# Allegro board PT8618_2.brd
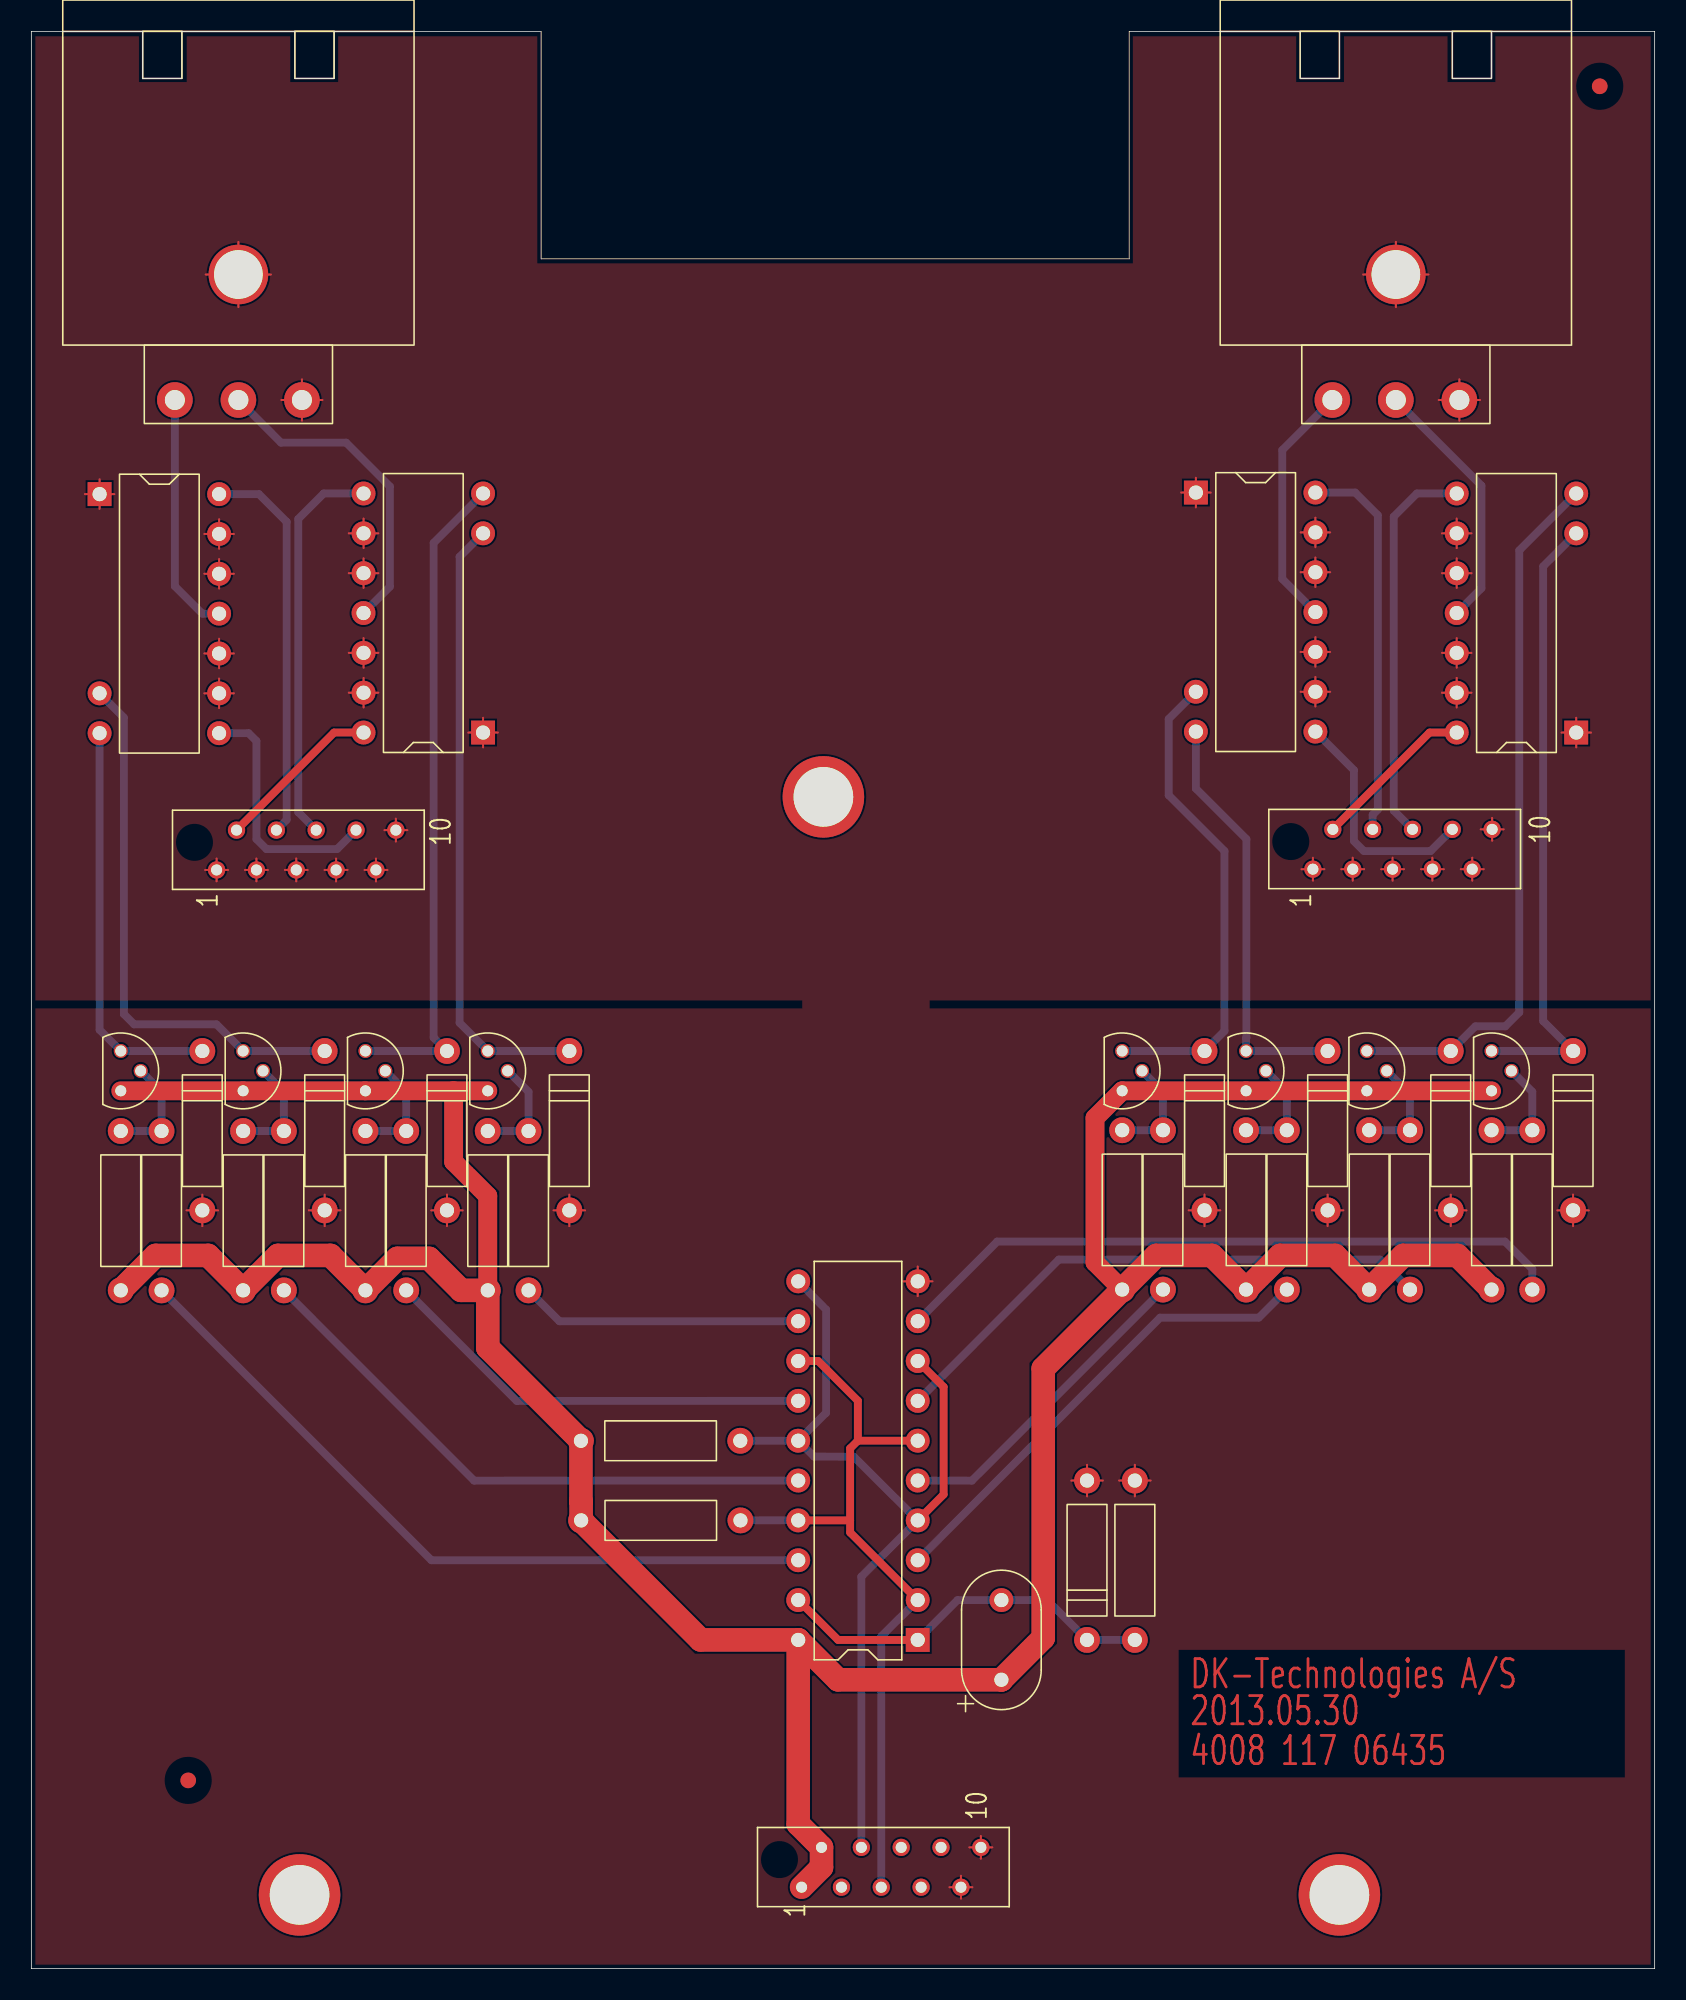
[diagram p0: board, top side]
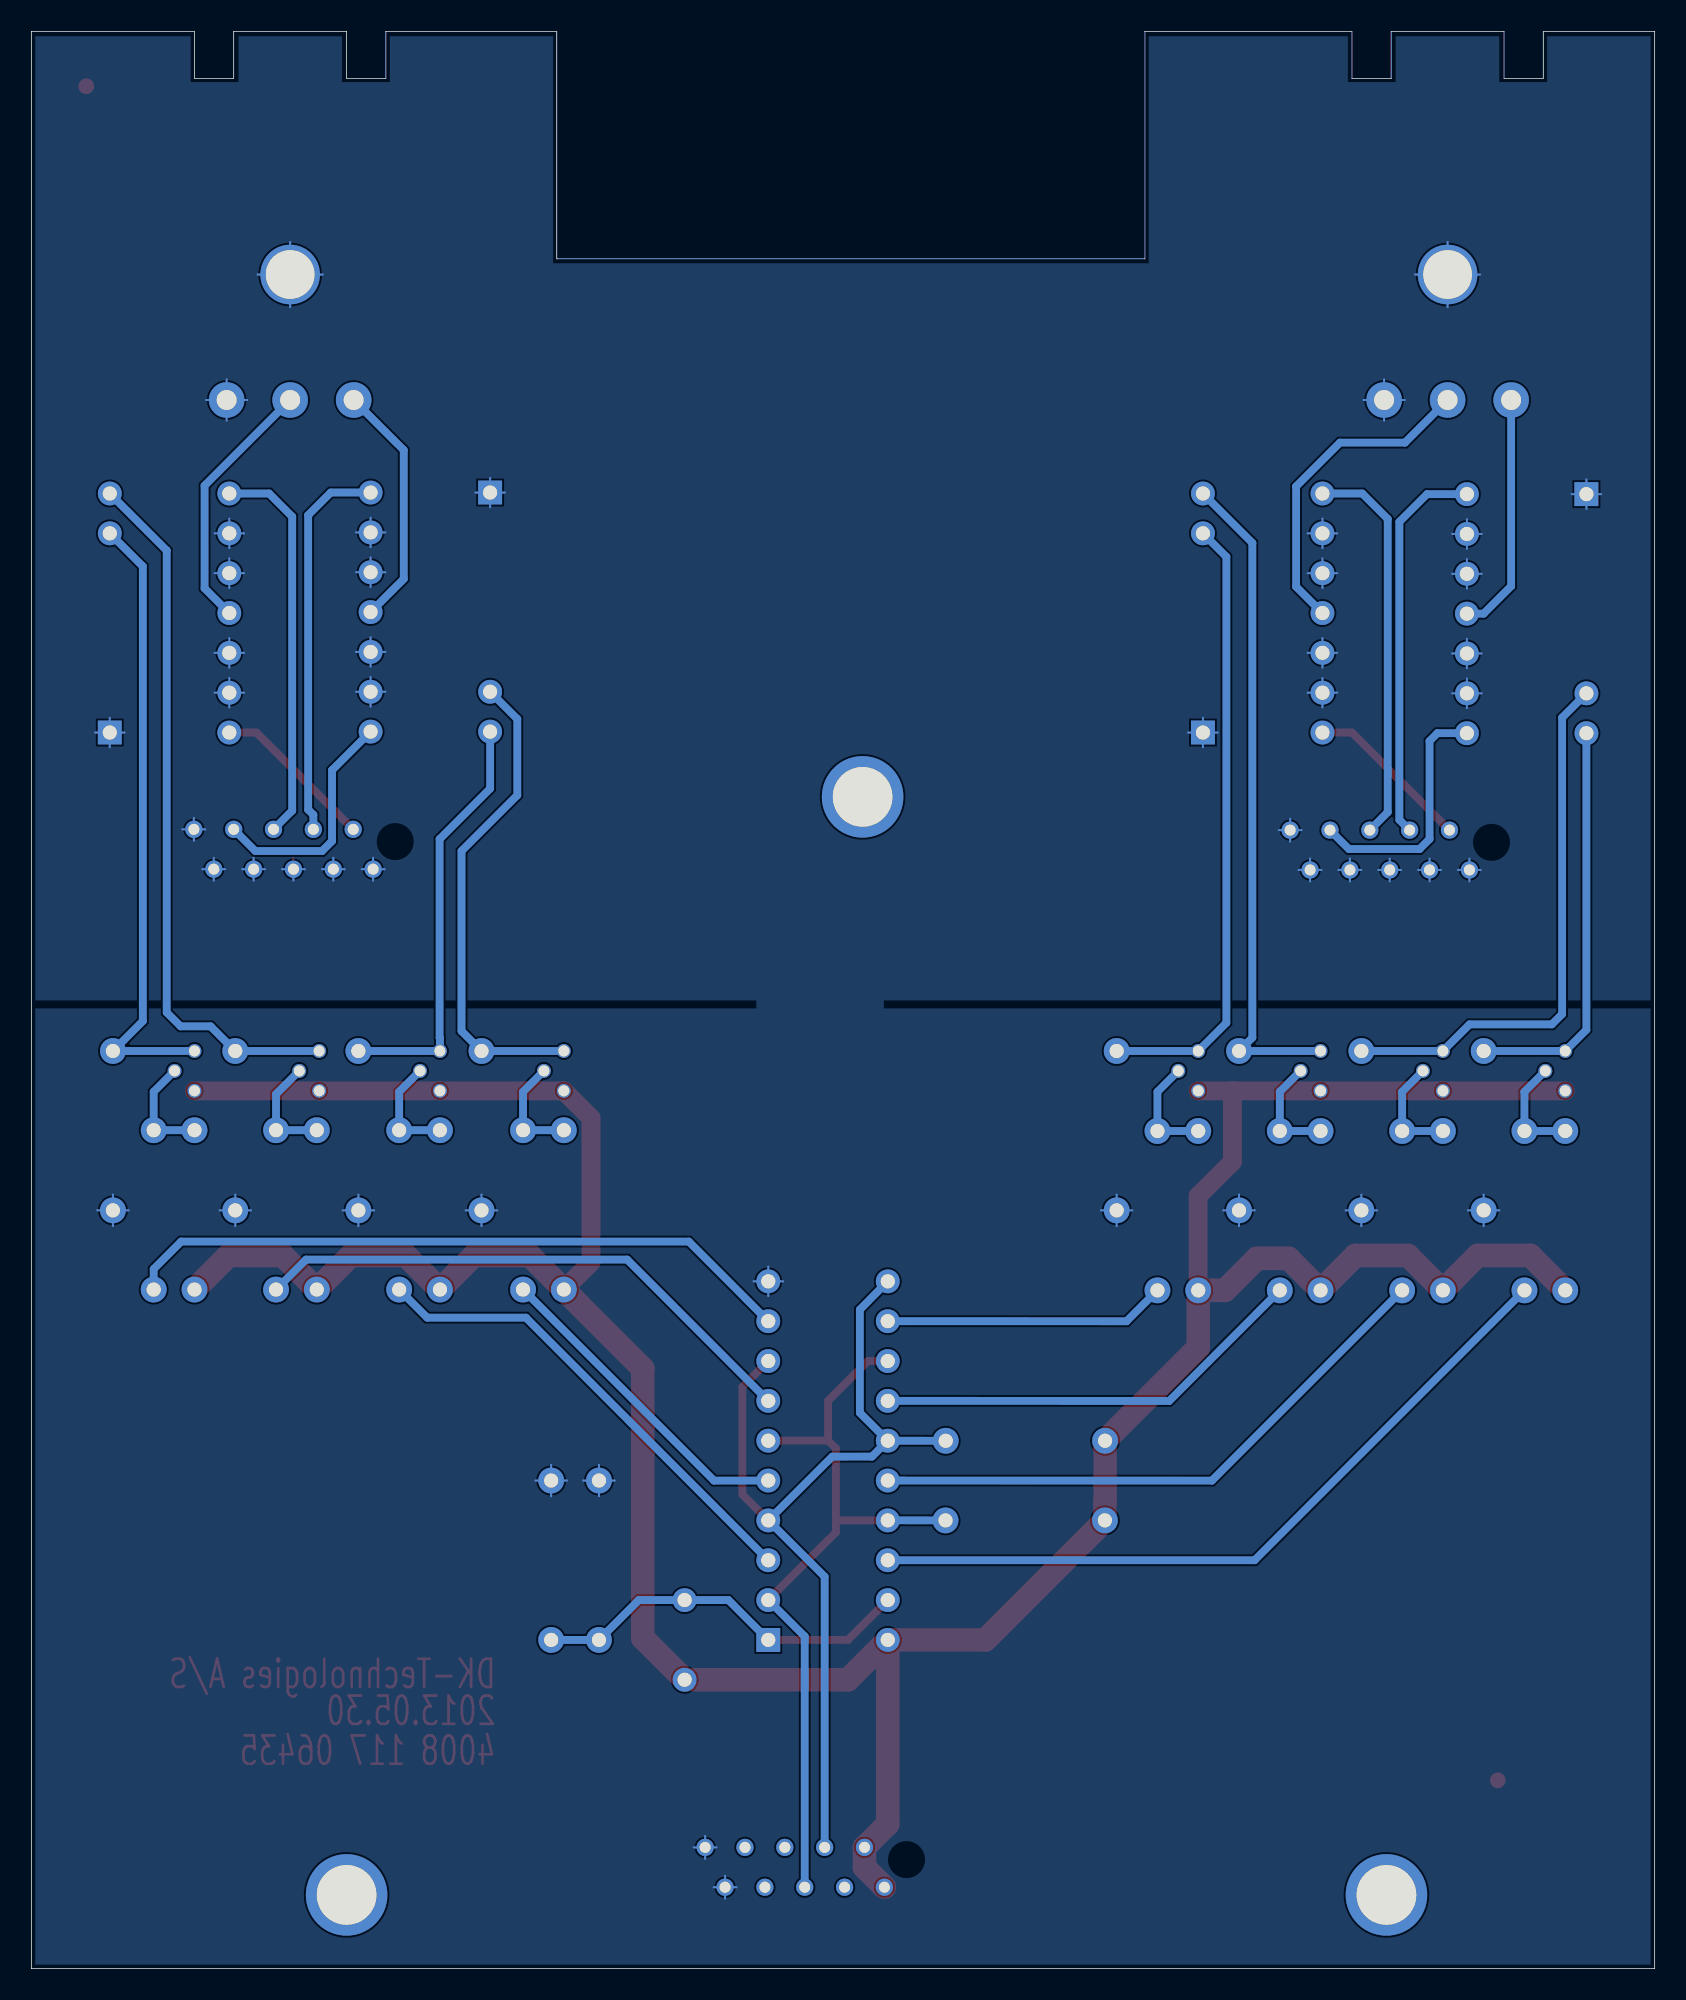
[diagram p1: board, bottom side, seen from below]

Outline 103.5 x 123.5 mm; copper layers: TOP, BOTTOM. Coordinates in mm from the lower left corner of the outline.
Outline path: 0,123.5 7.1,123.5 7.1,120.5 9.6,120.5 9.6,123.5 16.8,123.5 16.8,120.5 19.3,120.5 19.3,123.5 32.5,123.5 32.5,109 70,109 70,123.5 80.9,123.5 80.9,120.5 83.4,120.5 83.4,123.5 90.6,123.5 90.6,120.5 93.1,120.5 93.1,123.5 103.5,123.5 103.5,0 0,0 0,123.5

## Placement (name value [footprint] x y rotation side)
C401  10u/16V  [CAP200MIL_POL]  61.85 18.41 0 top
D401  BAW62  [DIODE400]  10.9 58.5 180 top
D402  BAW62  [DIODE400]  18.7 58.5 180 top
D403  BAW62  [DIODE400]  26.5 58.5 180 top
D404  BAW62  [DIODE400]  34.3 58.5 180 top
D405  BAW62  [DIODE400]  90.5 58.5 180 top
D406  BAW62  [DIODE400]  98.3 58.5 180 top
D407  BAW62  [DIODE400]  82.65 58.5 180 top
D408  BAW62  [DIODE400]  74.8 58.5 180 top
D409  BAT81  [DIODE400]  67.31 20.95 0 top
NOREF  -  [unnamed]  17.1 4.7 0 top
NOREF#2  -  [unnamed#2]  100 120 0 top
NOREF#3  -  [unnamed]  50.5 74.7 0 top
NOREF#4  -  [unnamed#2]  10 12 0 top
NOREF#5  -  [unnamed]  83.4 4.7 0 top
Q401  BC327  [TO92_OFF]  5.7 58.5 0 top
Q402  BC327  [TO92_OFF]  13.5 58.5 0 top
Q403  BC327  [TO92_OFF]  21.3 58.5 0 top
Q404  BC327  [TO92_OFF]  29.1 58.5 0 top
Q405  BC327  [TO92_OFF]  85.15 58.5 0 top
Q406  BC327  [TO92_OFF]  93.1 58.5 0 top
Q407  BC327  [TO92_OFF]  77.45 58.5 0 top
Q408  BC327  [TO92_OFF]  69.55 58.5 0 top
R401  2K67  [RES400]  8.3 53.4 180 top
R402  1K0  [RES400]  5.7 53.4 180 top
R403  2K67  [RES400]  16.1 53.4 180 top
R404  1K0  [RES400]  13.5 53.4 180 top
R405  2K67  [RES400]  23.9 53.4 180 top
R406  1K0  [RES400]  21.3 53.4 180 top
R407  2K67  [RES400]  31.7 53.4 180 top
R408  1K0  [RES400]  29.1 53.4 180 top
R409  2K67  [RES400]  87.9 53.45 180 top
R410  1K0  [RES400]  85.3 53.45 180 top
R411  2K67  [RES400]  95.7 53.45 180 top
R412  1K0  [RES400]  93.1 53.45 180 top
R413  2K67  [RES400]  80.05 53.45 180 top
R414  1K0  [RES400]  77.45 53.45 180 top
R415  2K67  [RES400]  72.15 53.45 180 top
R416  1K0  [RES400]  69.55 53.45 180 top
R417  10K0  [RES400]  70.36 31.11 180 top
R418  10K0  [RES400]  45.2 33.65 90 top
R419  10K0  [RES400]  45.21 28.57 90 top
RE401  RK1-L2-SV  [DIP14_3-RELAY]  4.35 94 0 top
RE402  RK1-L2-SV  [DIP14_3-RELAY]  28.8 78.8 180 top
RE403  RK1-L2-SV  [DIP14_3-RELAY]  74.25 94.1 0 top
RE404  RK1-L2-SV  [DIP14_3-RELAY]  98.5 78.8 180 top
U401  SN74HC244N  [DIP20_3]  56.52 20.95 180 top
XA4  CON10  [CONN_MICROMATCH_10]  33.4 67.5 90 top
XB4  CON4  [CONN_XLM-3-32PCV]  13.2 100 270 top
XC4  CON10  [CONN_MICROMATCH_10]  103.3 67.55 90 top
XD4  CON4  [CONN_XLM-3-32PCV]  87 100 270 top
XE4  CON10  [CONN_MICROMATCH_10]  70.7 2.65 90 top

## Library data of the parts
C401 = CAPACITOR POL_0: User Part Number: ***; Tolerance: ***
D401-D409 = DIODE_0: User Part Number: ***; Tolerance: ***
Q401-Q408 = PNP_0
R401-R419 = R_0: Tolerance: ***; User Part Number: ***
RE401-RE404 = RELAY SPDT_5: User Part Number: ***; Tolerance: ***
U401 = 74LVT244: Tolerance: ***; User Part Number: ***
XA4 XC4 XE4 = CON10
XB4 XD4 = CON4

## Footprints (pads in the part's own frame, mm; a bottom-side part is the same pattern mirrored in y, then rotated)
CAP200MIL_POL
  round 1.524 hole 0.9: 1(0,0) 2(0,5.08)
CONN_MICROMATCH_10
  round 0 hole 1.95 unplated: (4.3,23)
  round 1.1 hole 0.7: 1(2.54,21.59) 2(5.08,20.32) 3(2.54,19.05) 4(5.08,17.78) 5(2.54,16.51) 6(5.08,15.24) 7(2.54,13.97) 8(5.08,12.7) 9(2.54,11.43) 10(5.08,10.16)
CONN_XLM-3-32PCV
  round 2.27 hole 1.27: 1(0,4.05) 2(0,-4.05) 3(0,0)
  round 3.8 hole 3.1: 4(-8,0)
DIODE400
  round 1.651 hole 0.9: 1(0,0) 2(0,10.16)
DIP14_3-RELAY
  rect 1.524x1.524 hole 0.9: 1(0,0)
  round 1.524 hole 0.9: 6(0,-12.7) 7(0,-15.24) 8(7.62,-15.24) 9(7.62,-12.7) 10(7.62,-10.16) 11(7.62,-7.62) 12(7.62,-5.08) 13(7.62,-2.54) 14(7.62,0)
DIP20_3
  rect 1.524x1.524 hole 0.9: 1(0,0)
  round 1.524 hole 0.9: 2(0,-2.54) 3(0,-5.08) 4(0,-7.62) 5(0,-10.16) 6(0,-12.7) 7(0,-15.24) 8(0,-17.78) 9(0,-20.32) 10(0,-22.86) 11(7.62,-22.86) 12(7.62,-20.32) 13(7.62,-17.78) 14(7.62,-15.24) 15(7.62,-12.7) 16(7.62,-10.16) 17(7.62,-7.62) 18(7.62,-5.08) 19(7.62,-2.54) 20(7.62,0)
RES400
  round 1.651 hole 0.9: 1(0,0) 2(0,10.16)
TO92_OFF
  round 0.889 hole 0.7: 1(0,0) 2(1.27,-1.27) 3(0,-2.54)
unnamed
  round 5.2 hole 3.8: (0,0)
unnamed#2
  round 1 smd: (0,0)

## Nets
+5V: C401.1 Q401.3(EMITTER) Q402.3(EMITTER) Q403.3(EMITTER) Q404.3(EMITTER) Q405.3(EMITTER) Q406.3(EMITTER) Q407.3(EMITTER) Q408.3(EMITTER) R402.2 R404.2 R406.2 R408.2 R410.2 R412.2 R414.2 R416.2 R418.2 R419.2 U401.20(VCC) XE4.1 XE4.2
GND_SIGNAL: D401.2 D402.2 D403.2 D404.2 D405.2 D406.2 D407.2 D408.2 D409.2 R417.1 RE401.1(C) RE401.9(C9) RE401.10(C10) RE401.12(C12) RE401.13(C13) RE402.1(C) RE402.9(C9) RE402.10(C10) RE402.12(C12) RE402.13(C13) RE403.1(C) RE403.9(C9) RE403.10(C10) RE403.12(C12) RE403.13(C13) RE404.1(C) RE404.9(C9) RE404.10(C10) RE404.12(C12) RE404.13(C13) U401.10(GND) XA4.1 XA4.3 XA4.5 XA4.7 XA4.9 XA4.10 XB4.1 XB4.4 XC4.1 XC4.3 XC4.5 XC4.7 XC4.9 XC4.10 XD4.1 XD4.4 XE4.9 XE4.10
RESET_REL: R419.1 U401.2(I0) U401.6(I2) U401.13(I6) U401.17(I4) XE4.5
SET_REL: R418.1 U401.4(I1) U401.8(I3) U401.11(I7) U401.15(I5) XE4.4
N01245: C401.2 D409.1 R417.2 U401.1(O\E\1\) U401.19(O\E\2\)
N02897: Q401.2(BASE) R401.1 R402.1
N03054: D401.1 Q401.1(COLLECTOR) RE401.7(SET)
N03551: Q402.2(BASE) R403.1 R404.1
N03575: D402.1 Q402.1(COLLECTOR) RE401.6(RESET)
N04126: Q403.2(BASE) R405.1 R406.1
N04150: D403.1 Q403.1(COLLECTOR) RE402.7(SET)
N04216: Q404.2(BASE) R407.1 R408.1
N04256: D404.1 Q404.1(COLLECTOR) RE402.6(RESET)
N04568: Q405.2(BASE) R409.1 R410.1
N04592: D405.1 Q405.1(COLLECTOR) RE404.7(SET)
N04658: Q406.2(BASE) R411.1 R412.1
N04698: D406.1 Q406.1(COLLECTOR) RE404.6(RESET)
N05603: Q407.2(BASE) R413.1 R414.1
N05627: D407.1 Q407.1(COLLECTOR) RE403.7(SET)
N05693: Q408.2(BASE) R415.1 R416.1
N05733: D408.1 Q408.1(COLLECTOR) RE403.6(RESET)
N06021: R401.2 U401.18(O0)
N06033: R403.2 U401.16(O1)
N06051: R405.2 U401.14(O2)
N06063: R407.2 U401.12(O3)
N06202: R413.2 U401.3(O4)
N06214: R415.2 U401.5(O5)
N06252: R409.2 U401.7(O6)
N06264: R411.2 U401.9(O7)
N07388: RE401.11(COMMON) XB4.2
N08121: RE402.11(COMMON) XB4.3
N13215: RE402.14(NC) XA4.2
N13219: RE402.8(NO) XA4.6
N13231: RE401.14(NC) XA4.4
N13243: RE401.8(NO) XA4.8
N13688: RE404.8(NO) XC4.6
N14649: RE404.14(NC) XC4.2
N14657: RE403.14(NC) XC4.4
N14661: RE403.8(NO) XC4.8
N15236: RE403.11(COMMON) XD4.2
N15633: RE404.11(COMMON) XD4.3

Pads without a net: XE4 3 6 7 8

## Routing (per net, layer and track width the routed paths; a pad name or vN(x,y) marks a point on that pad's centre or on a via; arc(x,y) is an arc through that point)
+5V: length 225.5
  TOP w1.2: 26.92,55.96 Q404.3 ; 26.92,55.96 26.92,51.44 29.1,49.26 R408.2 ; 26.92,55.96 Q403.3 Q402.3 Q401.3 ; Q406.3 Q405.3 Q407.3 Q408.3 67.82,54.23 67.82,45.02 R416.2
  TOP w1.5: U401.20 48.9,9.21 XE4.2 50.38,6.46 XE4.1 ; U401.20 51.44,18.41 C401.1 64.52,21.08 64.52,38.26 R416.2 71.73,45.47 75.27,45.47 R414.2 79.63,45.47 83.12,45.47 R410.2 87.48,45.47 90.92,45.47 R412.2 ; U401.20 42.67,20.95 R419.2 35.05,29.78 35.04,29.79 R418.2 29.1,39.59 R408.2 27.4,43.24 25.36,45.28 23.34,45.28 R406.2 19.07,45.47 15.73,45.47 R404.2 11.27,45.47 7.93,45.47 R402.2
GND_SIGNAL: length 373.3
  TOP w0.127: D408.2 74.8,49.34 ; D408.2 74.8,47.34 ; D408.2 75.8,48.34 ; D408.2 73.8,48.34 ; 81.87,83 RE403.10 ; RE403.10 80.93,83.94 ; RE403.10 81.87,84.88 ; RE403.10 82.81,83.94 ; 87,105.92 XD4.4 ; XD4.4 89.08,108 ; XD4.4 84.92,108 ; XD4.4 87,110.08 ; 89.74,100 XD4.1 ; XD4.1 92.36,100 ; XD4.1 91.05,101.31 ; XD4.1 91.05,98.69 ; RE401.1 4.35,94.94 ; RE401.1 5.29,94 ; RE401.1 3.41,94 ; RE401.1 4.35,93.06 ; 21.24,70.04 XA4.9 ; XA4.9 22.7,70.04 ; XA4.9 21.97,70.77 ; XA4.9 21.97,69.31 ; RE402.12 21.18,84.82 ; RE402.12 22.12,83.88 ; RE402.12 21.18,82.94 ; RE402.12 20.24,83.88 ; XA4.10 23.24,73.31 ; XA4.10 22.51,72.58 ; XA4.10 23.24,71.85 ; XA4.10 23.97,72.58 ; RE401.9 11.97,82.24 ; RE401.9 11.97,80.36 ; RE401.9 12.91,81.3 ; RE401.9 11.03,81.3 ; D402.2 18.7,49.34 ; D402.2 18.7,47.34 ; D402.2 17.7,48.34 ; D402.2 19.7,48.34 ; 11.03,91.46 RE401.13 ; RE401.13 11.97,92.4 ; RE401.13 11.97,90.52 ; RE401.13 12.91,91.46 ; D401.2 10.9,49.34 ; D401.2 9.9,48.34 ; D401.2 10.9,47.34 ; D401.2 11.9,48.34 ; 11.03,83.84 RE401.10 ; RE401.10 11.97,84.78 ; RE401.10 11.97,82.9 ; RE401.10 12.91,83.84 ; 81.87,90.62 RE403.13 ; RE403.13 81.87,92.5 ; RE403.13 80.93,91.56 ; RE403.13 82.81,91.56 ; 25.5,48.34 D403.2 ; D403.2 26.5,49.34 ; D403.2 26.5,47.34 ; D403.2 27.5,48.34 ; D404.2 35.3,48.34 ; D404.2 34.3,47.34 ; D404.2 34.3,49.34 ; D404.2 33.3,48.34 ; U401.10 56.52,44.76 ; U401.10 55.58,43.81 ; U401.10 56.52,42.88 ; U401.10 57.45,43.81 ; 11.81,69.31 XA4.1 ; XA4.1 11.08,70.04 ; XA4.1 12.54,70.04 ; XA4.1 11.81,70.77 ; XC4.3 84.25,70.82 ; XC4.3 83.52,70.09 ; XC4.3 84.98,70.09 ; XC4.3 84.25,69.36 ; 59.81,7.73 XE4.10 ; XE4.10 60.54,8.46 ; XE4.10 61.27,7.73 ; XE4.10 60.54,7 ; RE403.12 81.87,89.96 ; RE403.12 80.93,89.02 ; RE403.12 81.87,88.08 ; RE403.12 82.81,89.02 ; RE402.13 22.12,81.34 ; RE402.13 20.24,81.34 ; RE402.13 21.18,82.28 ; RE402.13 21.18,80.4 ; RE404.13 91.82,81.34 ; RE404.13 89.94,81.34 ; RE404.13 90.88,80.4 ; RE404.13 90.88,82.28 ; R417.1 70.36,32.12 ; R417.1 70.36,30.11 ; R417.1 69.35,31.11 ; R417.1 71.36,31.11 ; XC4.5 86.79,70.82 ; XC4.5 87.52,70.09 ; XC4.5 86.06,70.09 ; XC4.5 86.79,69.36 ; 27.86,78.8 RE402.1 ; RE402.1 29.74,78.8 ; RE402.1 28.8,79.74 ; RE402.1 28.8,77.86 ; 67.31,30.11 D409.2 ; D409.2 68.31,31.11 ; D409.2 67.31,32.12 ; D409.2 66.31,31.11 ; 81.71,69.36 XC4.1 ; XC4.1 80.98,70.09 ; XC4.1 81.71,70.82 ; XC4.1 82.44,70.09 ; 13.2,105.92 XB4.4 ; XB4.4 11.12,108 ; XB4.4 15.28,108 ; XB4.4 13.2,110.08 ; XB4.1 17.25,101.31 ; XB4.1 15.94,100 ; XB4.1 17.25,98.69 ; XB4.1 18.56,100 ; 92.41,72.63 XC4.10 ; XC4.10 93.14,71.9 ; XC4.10 93.14,73.36 ; XC4.10 93.87,72.63 ; RE404.9 90.88,92.44 ; RE404.9 89.94,91.5 ; RE404.9 90.88,90.56 ; RE404.9 91.82,91.5 ; XC4.9 91.87,70.82 ; XC4.9 91.87,69.36 ; XC4.9 91.14,70.09 ; XC4.9 92.6,70.09 ; 89.94,83.88 RE404.12 ; RE404.12 90.88,84.82 ; RE404.12 91.82,83.88 ; RE404.12 90.88,82.94 ; 11.97,87.98 RE401.12 ; RE401.12 11.97,89.86 ; RE401.12 12.91,88.92 ; RE401.12 11.03,88.92 ; 20.24,88.96 RE402.10 ; RE402.10 21.18,89.9 ; RE402.10 22.12,88.96 ; RE402.10 21.18,88.02 ; 88.6,70.09 XC4.7 ; XC4.7 89.33,69.36 ; XC4.7 90.06,70.09 ; XC4.7 89.33,70.82 ; 90.5,47.34 D405.2 ; D405.2 90.5,49.34 ; D405.2 91.5,48.34 ; D405.2 89.5,48.34 ; 97.3,48.34 D406.2 ; D406.2 99.3,48.34 ; D406.2 98.3,49.34 ; D406.2 98.3,47.34 ; 81.65,48.34 D407.2 ; D407.2 82.65,47.34 ; D407.2 82.65,49.34 ; D407.2 83.65,48.34 ; RE404.1 98.5,79.74 ; RE404.1 98.5,77.86 ; RE404.1 97.56,78.8 ; RE404.1 99.44,78.8 ; 74.25,93.16 RE403.1 ; RE403.1 73.31,94.1 ; RE403.1 74.25,95.04 ; RE403.1 75.19,94.1 ; 89.94,88.96 RE404.10 ; RE404.10 90.88,89.9 ; RE404.10 90.88,88.02 ; RE404.10 91.82,88.96 ; XA4.3 14.35,70.77 ; XA4.3 14.35,69.31 ; XA4.3 15.08,70.04 ; XA4.3 13.62,70.04 ; 21.18,90.56 RE402.9 ; RE402.9 22.12,91.5 ; RE402.9 21.18,92.44 ; RE402.9 20.24,91.5 ; RE403.9 82.81,81.4 ; RE403.9 81.87,82.34 ; RE403.9 80.93,81.4 ; RE403.9 81.87,80.46 ; 58.54,5.19 XE4.9 ; XE4.9 59.27,5.92 ; XE4.9 60,5.19 ; XE4.9 59.27,4.46 ; XA4.7 20.16,70.04 ; XA4.7 19.43,69.31 ; XA4.7 18.7,70.04 ; XA4.7 19.43,70.77 ; XA4.5 17.62,70.04 ; XA4.5 16.89,70.77 ; XA4.5 16.16,70.04 ; XA4.5 16.89,69.31
  BOTTOM w0.127: 11.97,90.52 RE401.13 ; RE401.13 11.03,91.46 ; RE401.13 11.97,92.4 ; RE401.13 12.91,91.46 ; RE402.13 21.18,82.28 ; RE402.13 22.12,81.34 ; RE402.13 20.24,81.34 ; RE402.13 21.18,80.4 ; D401.2 11.9,48.34 ; D401.2 10.9,47.34 ; D401.2 10.9,49.34 ; D401.2 9.9,48.34 ; XC4.10 93.87,72.63 ; XC4.10 92.41,72.63 ; XC4.10 93.14,73.36 ; XC4.10 93.14,71.9 ; RE401.10 11.97,84.78 ; RE401.10 11.03,83.84 ; RE401.10 12.91,83.84 ; RE401.10 11.97,82.9 ; 11.81,69.31 XA4.1 ; XA4.1 11.08,70.04 ; XA4.1 12.54,70.04 ; XA4.1 11.81,70.77 ; 82.65,47.34 D407.2 ; D407.2 81.65,48.34 ; D407.2 83.65,48.34 ; D407.2 82.65,49.34 ; RE404.1 99.44,78.8 ; RE404.1 98.5,77.86 ; RE404.1 97.56,78.8 ; RE404.1 98.5,79.74 ; XE4.9 59.27,5.92 ; XE4.9 58.54,5.19 ; XE4.9 59.27,4.46 ; XE4.9 60,5.19 ; XD4.4 89.08,108 ; XD4.4 84.92,108 ; XD4.4 87,110.08 ; XD4.4 87,105.92 ; 98.3,47.34 D406.2 ; D406.2 97.3,48.34 ; D406.2 99.3,48.34 ; D406.2 98.3,49.34 ; XA4.9 22.7,70.04 ; XA4.9 21.97,69.31 ; XA4.9 21.97,70.77 ; XA4.9 21.24,70.04 ; RE402.10 21.18,89.9 ; RE402.10 21.18,88.02 ; RE402.10 20.24,88.96 ; RE402.10 22.12,88.96 ; XC4.9 91.87,70.82 ; XC4.9 91.87,69.36 ; XC4.9 92.6,70.09 ; XC4.9 91.14,70.09 ; 20.24,83.88 RE402.12 ; RE402.12 22.12,83.88 ; RE402.12 21.18,84.82 ; RE402.12 21.18,82.94 ; RE404.13 91.82,81.34 ; RE404.13 89.94,81.34 ; RE404.13 90.88,80.4 ; RE404.13 90.88,82.28 ; 13.62,70.04 XA4.3 ; XA4.3 14.35,69.31 ; XA4.3 14.35,70.77 ; XA4.3 15.08,70.04 ; D405.2 91.5,48.34 ; D405.2 90.5,47.34 ; D405.2 89.5,48.34 ; D405.2 90.5,49.34 ; XC4.5 87.52,70.09 ; XC4.5 86.06,70.09 ; XC4.5 86.79,69.36 ; 74.25,93.16 RE403.1 ; RE403.1 73.31,94.1 ; RE403.1 75.19,94.1 ; RE403.1 74.25,95.04 ; 81.71,69.36 XC4.1 ; XC4.1 81.71,70.82 ; XC4.1 82.44,70.09 ; XC4.1 80.98,70.09 ; 27.86,78.8 RE402.1 ; RE402.1 28.8,77.86 ; RE402.1 28.8,79.74 ; RE402.1 29.74,78.8 ; D404.2 35.3,48.34 ; D404.2 34.3,49.34 ; D404.2 33.3,48.34 ; D404.2 34.3,47.34 ; 89.94,83.88 RE404.12 ; RE404.12 90.88,84.82 ; RE404.12 90.88,82.94 ; RE404.12 91.82,83.88 ; 16.16,70.04 XA4.5 ; XA4.5 16.89,70.77 ; XA4.5 17.62,70.04 ; XA4.5 16.89,69.31 ; XC4.3 84.25,70.82 ; XC4.3 83.52,70.09 ; XC4.3 84.25,69.36 ; XC4.3 84.98,70.09 ; RE401.12 11.97,89.86 ; RE401.12 11.97,87.98 ; RE401.12 11.03,88.92 ; RE401.12 12.91,88.92 ; 81.87,88.08 RE403.12 ; RE403.12 81.87,89.96 ; RE403.12 80.93,89.02 ; RE403.12 82.81,89.02 ; 67.31,30.11 D409.2 ; D409.2 68.31,31.11 ; D409.2 66.31,31.11 ; D409.2 67.31,32.12 ; 11.97,80.36 RE401.9 ; RE401.9 11.03,81.3 ; RE401.9 11.97,82.24 ; RE401.9 12.91,81.3 ; 55.58,43.81 U401.10 ; U401.10 56.52,42.88 ; U401.10 56.52,44.76 ; U401.10 57.45,43.81 ; 13.2,105.92 XB4.4 ; XB4.4 15.28,108 ; XB4.4 11.12,108 ; XB4.4 13.2,110.08 ; RE402.9 22.12,91.5 ; RE402.9 21.18,90.56 ; RE402.9 20.24,91.5 ; RE402.9 21.18,92.44 ; 89.74,100 XD4.1 ; XD4.1 91.05,101.31 ; XD4.1 92.36,100 ; XD4.1 91.05,98.69 ; 69.35,31.11 R417.1 ; R417.1 71.36,31.11 ; R417.1 70.36,30.11 ; R417.1 70.36,32.12 ; RE403.13 81.87,92.5 ; RE403.13 80.93,91.56 ; RE403.13 82.81,91.56 ; RE403.13 81.87,90.62 ; RE404.10 90.88,89.9 ; RE404.10 89.94,88.96 ; RE404.10 91.82,88.96 ; RE404.10 90.88,88.02 ; 80.93,81.4 RE403.9 ; RE403.9 81.87,80.46 ; RE403.9 81.87,82.34 ; RE403.9 82.81,81.4 ; 88.6,70.09 XC4.7 ; XC4.7 90.06,70.09 ; XC4.7 89.33,69.36 ; XC4.7 89.33,70.82 ; RE403.10 82.81,83.94 ; RE403.10 81.87,84.88 ; RE403.10 81.87,83 ; RE403.10 80.93,83.94 ; 59.81,7.73 XE4.10 ; XE4.10 60.54,8.46 ; XE4.10 61.27,7.73 ; XE4.10 60.54,7 ; 3.41,94 RE401.1 ; RE401.1 4.35,93.06 ; RE401.1 4.35,94.94 ; RE401.1 5.29,94 ; XB4.1 18.56,100 ; XB4.1 17.25,98.69 ; XB4.1 17.25,101.31 ; XB4.1 15.94,100 ; 89.94,91.5 RE404.9 ; RE404.9 90.88,90.56 ; RE404.9 90.88,92.44 ; RE404.9 91.82,91.5 ; 18.7,47.34 D402.2 ; D402.2 19.7,48.34 ; D402.2 18.7,49.34 ; D402.2 17.7,48.34 ; 26.5,47.34 D403.2 ; D403.2 25.5,48.34 ; D403.2 27.5,48.34 ; D403.2 26.5,49.34 ; D408.2 75.8,48.34 ; D408.2 73.8,48.34 ; D408.2 74.8,47.34 ; D408.2 74.8,49.34 ; XA4.10 23.24,73.31 ; XA4.10 22.51,72.58 ; XA4.10 23.97,72.58 ; XA4.10 23.24,71.85 ; 19.43,69.31 XA4.7 ; XA4.7 18.7,70.04 ; XA4.7 19.43,70.77 ; XA4.7 20.16,70.04
RESET_REL: length 49.6
  TOP w0.5: 52.7,33.66 52.7,36.2 50.16,38.73 U401.13 ; 52.7,33.66 U401.6 ; 52.7,33.66 52.2,33.16 52.2,28.57 ; 56.52,23.5 52.2,27.8 52.2,28.57 ; 52.2,28.57 U401.17
  BOTTOM w0.5: 56.52,23.5 54.19,21.18 XE4.5 ; U401.17 48.89,28.58 R419.1
SET_REL: length 58.9
  TOP w0.5: U401.8 58.17,37.08 58.17,30.23 U401.4
  BOTTOM w0.5: U401.15 50.67,35.43 50.67,42.01 U401.11 ; U401.15 49.9,32.64 52.44,32.64 U401.4 52.92,24.99 XE4.4 ; U401.15 R418.1
N01245: length 24.6
  TOP w0.5: 48.9,23.5 51.44,20.95 U401.1
  BOTTOM w0.5: U401.1 59.05,23.5 64.77,23.5 D409.1 R417.2
N02897: length 7
  BOTTOM w0.5: Q401.2 8.3,55.9 R401.1 R402.1
N03054: length 26
  BOTTOM w0.5: RE401.7 4.35,59.85 Q401.1 D401.1
N03551: length 7
  BOTTOM w0.5: R404.1 R403.1 16.1,55.9 Q402.2
N03575: length 34.9
  BOTTOM w0.5: D402.1 Q402.1 11.8,60.2 6.55,60.2 5.9,60.85 5.9,79.75 RE401.6
N04126: length 7
  BOTTOM w0.5: R406.1 R405.1 23.9,55.9 Q403.2
N04150: length 42.4
  BOTTOM w0.5: RE402.7 25.65,90.89 25.65,59.35 D403.1 Q403.1
N04216: length 7
  BOTTOM w0.5: R408.1 R407.1 31.7,55.9 Q404.2
N04256: length 39.6
  BOTTOM w0.5: D404.1 Q404.1 27.3,60.3 27.3,90 RE402.6
N04568: length 7
  BOTTOM w0.5: R410.1 R409.1 87.9,55.75 Q405.2
N04592: length 45.3
  BOTTOM w0.5: Q405.1 D405.1 92.07,60.07 93.98,60.07 94.87,60.96 94.87,90.41 RE404.7
N04658: length 6.9
  BOTTOM w0.5: Q406.2 95.7,55.9 R411.1 R412.1
N04698: length 39.9
  BOTTOM w0.5: RE404.6 96.39,89.39 96.39,60.41 D406.1 Q406.1
N05603: length 6.9
  BOTTOM w0.5: Q407.2 80.05,55.9 R413.1 R414.1
N05627: length 26.9
  BOTTOM w0.5: D407.1 Q407.1 77.45,59.32 77.47,59.34 77.47,72.01 74.25,75.23 RE403.7
N05693: length 6.9
  BOTTOM w0.5: R416.1 R415.1 72.15,55.9 Q408.2
N05733: length 30.9
  BOTTOM w0.5: RE403.6 72.52,79.67 72.52,74.8 76.07,71.25 76.07,59.77 D408.1 Q408.1
N06021: length 47.7
  BOTTOM w0.5: R401.2 25.5,26.04 48.9,26.04
N06033: length 37.8
  BOTTOM w0.5: U401.16 28.23,31.11 R403.2
N06051: length 27.9
  BOTTOM w0.5: R405.2 30.95,36.19 U401.14
N06063: length 18
  BOTTOM w0.5: R407.2 33.67,41.27 U401.12
N06202: length 30.7
  BOTTOM w0.5: 56.52,26.04 71.97,41.5 78.26,41.5 R413.2
N06214: length 20.7
  BOTTOM w0.5: U401.5 59.97,31.11 R415.2
N06252: length 35.9
  BOTTOM w0.5: U401.7 65.51,45.2 85.99,45.2 R409.2
N06264: length 43.3
  BOTTOM w0.5: R411.2 95.7,44.6 93.95,46.35 61.58,46.35 U401.9
N07388: length 15.4
  BOTTOM w0.5: RE401.11 10.9,86.38 9.15,88.13 XB4.2
N08121: length 20.7
  BOTTOM w0.5: RE402.11 22.86,88.1 22.86,94.49 20.07,97.28 15.92,97.28 XB4.3
N13215: length 10.7
  TOP w0.5: RE402.14 19.3,78.8 XA4.2
N13219: length 25.1
  BOTTOM w0.5: RE402.8 18.64,94.04 17.02,92.42 17.02,73.72 XA4.6
N13231: length 25
  BOTTOM w0.5: XA4.4 16.28,73.24 16.28,92.23 14.51,94 RE401.14
N13243: length 16
  BOTTOM w0.5: XA4.8 19.49,71.37 14.99,71.37 14.35,72.01 14.35,78.26 13.85,78.76 RE401.8
N13688: length 25.1
  BOTTOM w0.5: RE404.8 88.34,94.04 86.87,92.57 86.87,73.82 XC4.6
N14649: length 10.5
  TOP w0.5: RE404.14 89.15,78.8 XC4.2
N14657: length 24.7
  BOTTOM w0.5: XC4.4 85.52,73.56 85.85,73.89 85.85,92.66 84.41,94.1 RE403.14
N14661: length 15.1
  BOTTOM w0.5: RE403.8 84.33,76.4 84.33,71.88 84.96,71.25 89.22,71.25 XC4.8
N15236: length 15.7
  BOTTOM w0.5: RE403.11 79.76,88.59 79.76,96.81 XD4.2
N15633: length 16.5
  BOTTOM w0.5: XD4.3 92.46,94.54 92.46,88 RE404.11

## Copper pours and planes (outline as drawn; the poured copper is in the pictures)
GND_SIGNAL on TOP: 0.25,0.25 0.25,61.21 49.15,61.21 49.15,61.72 0.25,61.72 0.25,123.19 6.86,123.19 6.86,120.27 9.91,120.27 9.91,123.19 16.51,123.19 16.51,120.27 19.56,120.27 19.56,123.19 32.26,123.19 32.26,108.71 70.23,108.71 70.23,123.19 80.64,123.19 80.64,120.27 83.69,120.27 83.69,123.19 90.3,123.19 90.3,120.27 93.34,120.27 93.34,123.19 103.25,123.19 103.25,61.72 57.28,61.72 57.28,61.21 103.25,61.21 103.25,0.25 ; 1 cut-out
GND_SIGNAL on BOTTOM: 0.25,0.25 0.25,61.21 49.15,61.21 49.15,61.72 0.25,61.72 0.25,123.19 6.86,123.19 6.86,120.27 9.91,120.27 9.91,123.19 16.51,123.19 16.51,120.27 19.56,120.27 19.56,123.19 32.26,123.19 32.26,108.71 70.23,108.71 70.23,123.19 80.64,123.19 80.64,120.27 83.69,120.27 83.69,123.19 90.3,123.19 90.3,120.27 93.34,120.27 93.34,123.19 103.25,123.19 103.25,61.72 57.28,61.72 57.28,61.21 103.25,61.21 103.25,0.25

## Text on the board
TOP: 2013.05.30 | 4008 117 06435 | DK-Technologies A/S
Ref Des/Assembly Top: DK-Technologies A/S | 2013.05.30 | 4008 117 06435
DIMENSION: 7.1 | 7.2 | 3.0 | 10.4 | 2.5 | 123.5 | 32.5 | 103.5 | 14.5
COMPVAL_TYPE_TOP: DK-Technologies A/S | 2013.02.14 | 4008 117 06434 | FIGURE | SIZE | 0.7 | 0.9 | 1.27 | 3.1 | 3.8 | 1.95 | DRILL CHART: TOP to BOTTOM | ALL UNITS ARE IN MILLIMETERS | TOLERANCE | +0.0/-0.0 | +0.08/-0.08 | PLATED | NON-PLATED | QTY | 54 | 118 | 6 | 2 | 3
